# Altium PCB RadiationDetector.PcbDoc (part 2 of 3)
Units mm, origin at the board's own origin, x right, y up, seen from the top; angles counter-clockwise.
Board outline 64 x 110 mm, 2 copper layers (Top Layer, Bottom Layer); 114 components, 79 nets, 398 pads, 0 vias.
Unrouted connection lines stored in the file: 269.
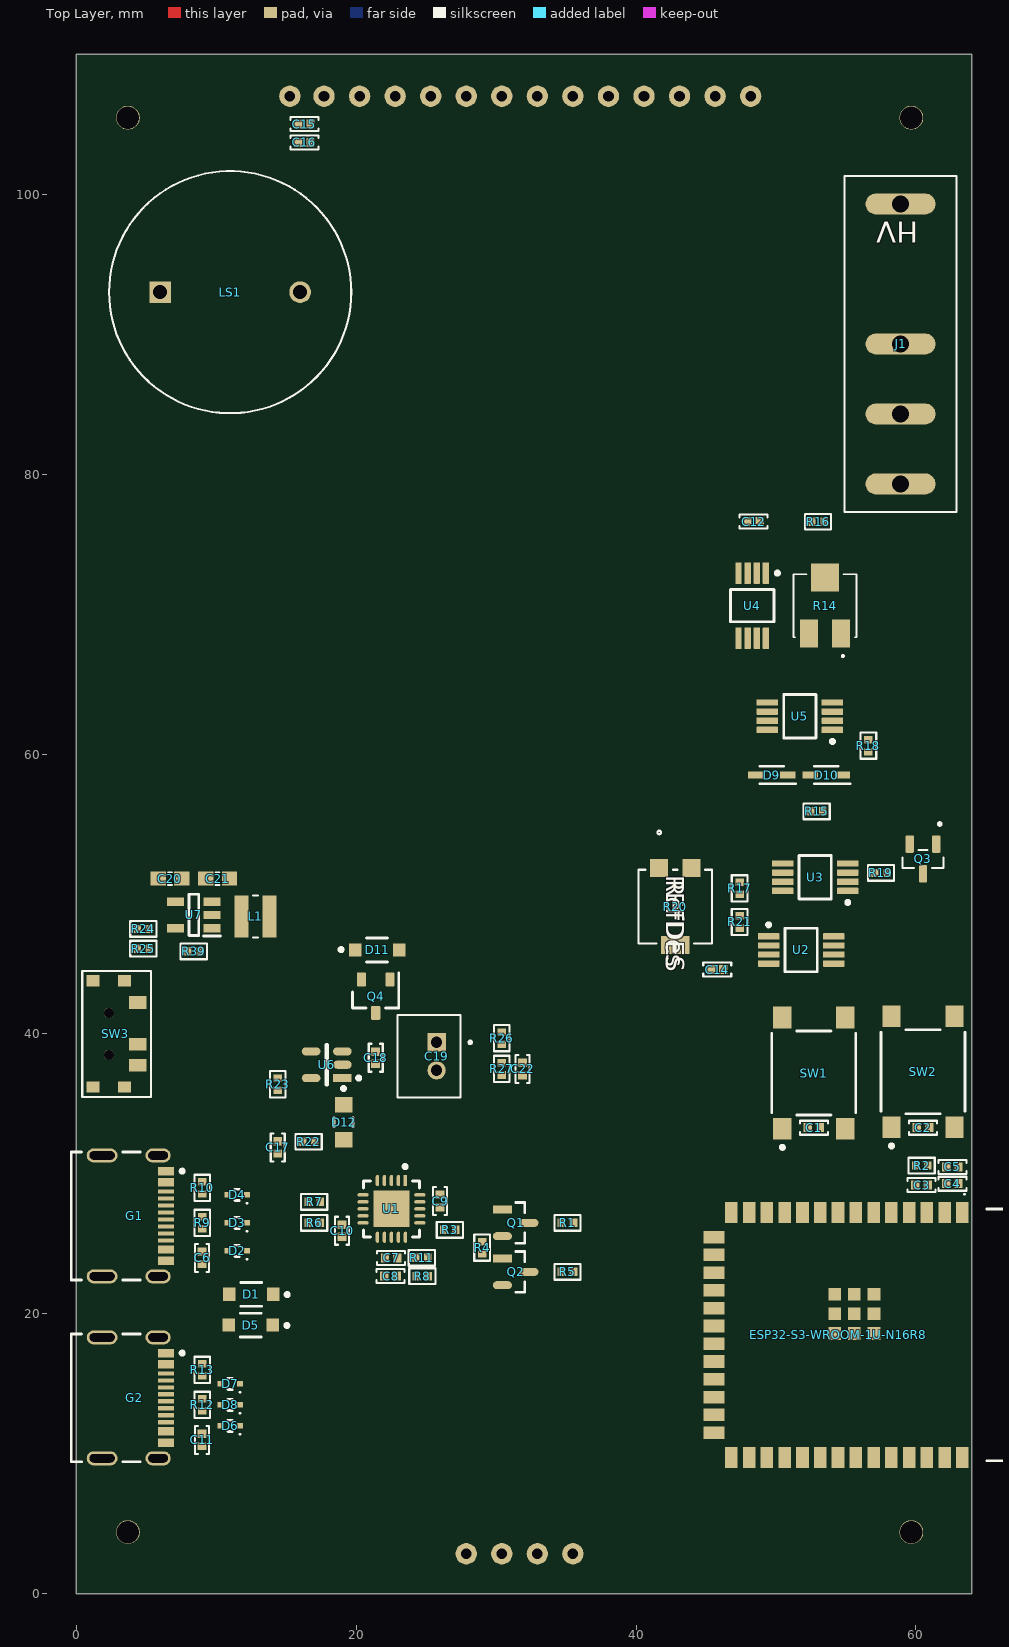
[diagram p0: Top Layer view]

## Part data (continued)
D2 D3 D4 D6 D7 D8: "TVS DIODE 5VWM SOD523", Breakdown Voltage-Nom=6.8V, LCSC Part Number=C93623, Manufacturer="ON Semiconductor", Max Breakdown Voltage=7.8V, Max Operating Temperature=150°C, Max Power Dissipation=200mW, Min Breakdown Voltage=5.8V, Min Operating Temperature=-55°C, Non-rep Peak Rev Power Dis-Max=50W, Package Body Material=Plastic, Package Shape=Rectangular, Package Style="SMALL OUTLINEMeter", Peak Reflow Temperature (Cel)=260°C, Rep Pk Reverse Voltage-Max=5V, Supplier Part Number=ESD5B5.0ST1GOSCT-ND, Time @ Peak Reflow Temperature-Max (s)=40s, Category="ESD and Circuit Protection ICs", ComponentLink1Description=https://datasheet.ciiva.com:443/pdfs/VipMasterIC/IC/ONSM/ONSM-S-A0006115580/ONSM-S-A0006115580-1.pdf?src-supplier=IHS+Markit, ComponentLink1URL=https://datasheet.ciiva.com:443/pdfs/VipMasterIC/IC/ONSM/ONSM-S-A0006115580/ONSM-S-A0006115580-1.pdf?src-supplier=IHS+Markit, ComponentLink2Description=https://datasheet.ciiva.com/339/esd5b5-0st1g-339772.pdf?src-supplier=Avnet, ComponentLink2URL=https://datasheet.ciiva.com/339/esd5b5-0st1g-339772.pdf?src-supplier=Avnet, ComponentLink3Description=https://datasheet.ciiva.com/339/esd5b5-0st1g-339772.pdf?src-supplier=Digikey, ComponentLink3URL=https://datasheet.ciiva.com/339/esd5b5-0st1g-339772.pdf?src-supplier=Digikey, ComponentLink4Description=https://datasheet.ciiva.com/4510/esd5b5-0st1g-241623-4510548.pdf?src-supplier=Mouser, ComponentLink4URL=https://datasheet.ciiva.com/4510/esd5b5-0st1g-241623-4510548.pdf?src-supplier=Mouser, ComponentLink5Description=https://datasheet.ciiva.com/22637/716649-22637178.pdf?src-supplier=Element14, ComponentLink5URL=https://datasheet.ciiva.com/22637/716649-22637178.pdf?src-supplier=Element14, ComponentLink6Description=https://datasheet.ciiva.com/339/esd5b5-0st1-d-339773.pdf?src-supplier=Digikey, ComponentLink6URL=https://datasheet.ciiva.com/339/esd5b5-0st1-d-339773.pdf?src-supplier=Digikey, ComponentLink7Description=https://datasheet.ciiva.com/339/esd5b5-0st1-d-339774.pdf?src-supplier=Digikey, ComponentLink7URL=https://datasheet.ciiva.com/339/esd5b5-0st1-d-339774.pdf?src-supplier=Digikey, Diode Element Material=SILICON, Diode Type="TRANS VOLTAGE SUPPRESSOR", JESD-30 Code=R-PDSO-F2, JESD-609 Code=e3, Manufacturer Part Number=ESD5B5.0ST1G, Moisture Sensitivity Level=1, Number of Elements=2, Pins=2, Polarity=Bidirectional, Pricing="1=0,18, 10=0,098, 100=0,052, 500=0,051, 1000=0,05 (USD)", Qualification Status="Not Qualified", Reach SVHC Compliant=Yes, RoHS=Yes, RoHS Compliant=Yes, Stock=174346, Supplier=Digikey, Surface Mount=Yes, Technology=AVALANCHE, Terminal Finish=Tin, Terminal Form=Flat, Terminal Position=DUAL
D9 D10: "DIODE SCHOTTKY 40V 1A SOD323", LCSC Part Number=C36975, Manufacturer=Nexperia, Max Operating Temperature=150°C, Max Output current=1A, Package Body Material=Plastic, Package Shape=Rectangular, Package Style="SMALL OUTLINEMeter", Peak Reflow Temperature (Cel)=260°C, Supplier Part Number=1727-5211-1-ND, Time @ Peak Reflow Temperature-Max (s)=40s, Category="Schottky Diodes", ComponentLink1Description=https://datasheet.ciiva.com:443/pdfs/VipMasterIC/IC/PHGL/PHGLS19535/PHGLS19689-1.pdf?src-supplier=IHS+Markit, ComponentLink1URL=https://datasheet.ciiva.com:443/pdfs/VipMasterIC/IC/PHGL/PHGLS19535/PHGLS19689-1.pdf?src-supplier=IHS+Markit, ComponentLink2Description=http://www.farnell.com/datasheets/689588.pdf?src-supplier=Farnell, ComponentLink2URL=http://www.farnell.com/datasheets/689588.pdf?src-supplier=Farnell, ComponentLink3Description=https://datasheet.octopart.com/PMEG4010BEA%2C115-Nexperia-datasheet-142110124.pdf?src-supplier=Future+Electronics, ComponentLink3URL=https://datasheet.octopart.com/PMEG4010BEA%2C115-Nexperia-datasheet-142110124.pdf?src-supplier=Future+Electronics, ComponentLink4Description=https://datasheet.octopart.com/PMEG4010BEA%2C115-Nexperia-datasheet-180924740.pdf?src-supplier=Newark, ComponentLink4URL=https://datasheet.octopart.com/PMEG4010BEA%2C115-Nexperia-datasheet-180924740.pdf?src-supplier=Newark, Diode Element Material=SILICON, Diode Type=RECTIFIER, JESD-30 Code=R-PDSO-G2, JESD-609 Code=e3, Manufacturer Part Number=PMEG4010BEA,115, Moisture Sensitivity Level=1, Number of Elements=1, Pins=2, Pricing="1=0,29, 10=0,171, 100=0,109, 500=0,09678, 1000=0,08581 (USD)", Qualification Status="Not Qualified", Reach SVHC Compliant=Yes, RoHS=Yes, RoHS Compliant=Yes, Stock=84260, Supplier=Digikey, Surface Mount=Yes, Technology=SCHOTTKY, Terminal Finish=Tin, Terminal Form="Gull Wing", Terminal Position=DUAL
D12: library part LTST-C171KGKT, "LED RED CLEAR SMD", Color=Green, Forward Current=30mA, LCSC Part Number=C284871, Manufacturer="Vishay Lite-On", Max Operating Temperature=85°C, Min Operating Temperature=-55°C, Supplier Part Number=160-1426-6-ND, Category=LEDs, Channels=1, ComponentLink1Description=https://datasheet.ciiva.com:443/pdfs/VipMasterIC/IC/LITE/LITES11816/LITES11816-1.pdf?src-supplier=IHS+Markit, ComponentLink1URL=https://datasheet.ciiva.com:443/pdfs/VipMasterIC/IC/LITE/LITES11816/LITES11816-1.pdf?src-supplier=IHS+Markit, ComponentLink2Description=https://datasheet.ciiva.com/11774/0900766b80dc0298-11774377.pdf?src-supplier=Rs, ComponentLink2URL=https://datasheet.ciiva.com/11774/0900766b80dc0298-11774377.pdf?src-supplier=Rs, ComponentLink3Description=https://datasheet.ciiva.com/2110/s-110-ltst-c171kgkt-2110073.pdf?src-supplier=Digikey, ComponentLink3URL=https://datasheet.ciiva.com/2110/s-110-ltst-c171kgkt-2110073.pdf?src-supplier=Digikey, ComponentLink4Description=https://datasheet.ciiva.com/2110/s-110-ltst-c171kgkt-2110072.pdf?src-supplier=Digikey, ComponentLink4URL=https://datasheet.ciiva.com/2110/s-110-ltst-c171kgkt-2110072.pdf?src-supplier=Digikey, ComponentLink5Description=https://datasheet.ciiva.com/2110/s-110-ltst-c171kgkt-2110074.pdf?src-supplier=Digikey, ComponentLink5URL=https://datasheet.ciiva.com/2110/s-110-ltst-c171kgkt-2110074.pdf?src-supplier=Digikey, JESD-609 Code=e3, Lens Style="WATER CLEAR", Luminous Intensity-Nom=35mcd, Manufacturer Part Number=LTST-C171KGKT, Mounting Technology="Surface Mount", Optoelectronic Device Type="SINGLE COLOR LED", Overall Height=0.8mm, Packaging="Tape and Reel", Pins=2, Pricing="1=0,15, 10=0,105, 100=0,0723, 500=0,05736, 1000=0,05238 (USD)", Reach SVHC Compliant=Yes, RoHS=Yes, RoHS Compliant=Yes, Shape=Rectangular, Size=1.4mm, Stock=28500, Supplier=Digikey, Terminal Finish=Tin, Terminal Pitch=2.5mm, Viewing Angle=130°
D13: "2A 1000V 1.3V SMB-FL Diodes - General Purpose ROHS", LCSC Part Number=C5271853
D14 D15 D16 D17 D18: "DIODE ZENER 120V 3W DO214AC", LCSC Part Number=C511105, Manufacturer=MCC, Max Operating Temperature=150°C, Max Power Dissipation=3W, Min Operating Temperature=-55°C, Package Body Material=Plastic, Package Shape=Rectangular, Package Style="SMALL OUTLINEMeter", Peak Reflow Temperature (Cel)=260°C, Reference Voltage-Nom=120V, Supplier Part Number=3SMAJ5951B-TPMSCT-ND, Test Current=3.1mA, Time @ Peak Reflow Temperature-Max (s)=10s, Voltage Tol-Max=5%, Category="Zener Diodes", ComponentLink1Description=https://datasheet.ciiva.com:443/pdfs/VipMasterIC/IC/MCCC/MCCC-S-A0009752199/MCCC-S-A0009752199-1.pdf?src-supplier=IHS+Markit, ComponentLink1URL=https://datasheet.ciiva.com:443/pdfs/VipMasterIC/IC/MCCC/MCCC-S-A0009752199/MCCC-S-A0009752199-1.pdf?src-supplier=IHS+Markit, ComponentLink2Description=https://datasheet.ciiva.com/6389/3smaj5913b3smaj5956bdo-214ac-6389957.pdf?src-supplier=Digikey, ComponentLink2URL=https://datasheet.ciiva.com/6389/3smaj5913b3smaj5956bdo-214ac-6389957.pdf?src-supplier=Digikey, Diode Element Material=SILICON, Diode Type=ZENER, Dynamic Impedance-Max=380R, JEDEC-95 Code=DO-214AC, JESD-30 Code=R-PDSO-C2, JESD-609 Code=e3, Manufacturer Part Number=3SMAJ5951B-TP, Moisture Sensitivity Level=1, Number of Elements=1, Pins=2, Polarity=Unidirectional, Pricing="1=0,42, 10=0,259, 100=0,1637, 500=0,12212, 1000=0,098, 2000=0,09734 (USD)", Reach SVHC Compliant=No, RoHS=Yes, RoHS Compliant=Yes, Stock=10918, Supplier=Digikey, Surface Mount=Yes, Technology=ZENER, Terminal Finish=Tin, Terminal Form="C BEND", Terminal Position=DUAL
D19 D20: "DIODE STANDARD 250V 200MA SOT233", Forward Voltage=1V, LCSC Part Number=C8661, Manufacturer=onsemi, Max Operating Temperature=175°C, Max Output current=200mA, Rep Pk Reverse Voltage-Max=200V, Supplier Part Number=9843728, ComponentLink1Description=https://datasheet.ciiva.com/1179/82312-1179824.pdf?src-supplier=Element14, ComponentLink1URL=https://datasheet.ciiva.com/1179/82312-1179824.pdf?src-supplier=Element14, ComponentLink2Description=https://datasheet.ciiva.com/1179/82312-1179825.pdf?src-supplier=Element14, ComponentLink2URL=https://datasheet.ciiva.com/1179/82312-1179825.pdf?src-supplier=Element14, Diode Type=RECTIFIER, JESD-609 Code=e0, Manufacturer Part Number=BAS21, Number of Elements=1, Pricing="5=0,185, 25=0,136, 100=0,0803, 250=0,0677, 500=0,0551, 1000=0,0425, 5000=0,023 (GBP)", Reverse Recovery Time-Max=0.05us, RoHS=Yes, RoHS Compliant=No, Supplier=Farnell, Surface Mount=Yes, Terminal Finish=Tin
ESP32-S3-WROOM-1U-N16R8: library part ESP32-S3-WROOM-1-N16R8, "SMD Module, ESP32-S3R8 With 8 mb", LCSC Part Number=C2913202, Manufacturer="Espressif Systems", Supplier Part Number=1965-ESP32-S3-WROOM-1U-N16R8CT-ND, Category=LDO, ComponentLink1Description=https://datasheet.octopart.com/ESP32-S3-WROOM-1U-N16R8-Espressif-Systems-datasheet-165560563.pdf?src-supplier=TME, ComponentLink1URL=https://datasheet.octopart.com/ESP32-S3-WROOM-1U-N16R8-Espressif-Systems-datasheet-165560563.pdf?src-supplier=TME, Manufacturer Part Number=ESP32-S3-WROOM-1U-N16R8, Pricing="1=6,56, 10=5,683, 25=5,378, 100=4,9592, 250=4,7084 (USD)", RoHS=No, Stock=124, Supplier=Digikey
G1 G2: library part 217179-0001, "CONN RCP USB2.0 TYP C 24P SMD RA", LCSC Part Number=C3197684, Manufacturer=Molex, Supplier Part Number=900-2171790001CT-ND, Category=Connectors, Manufacturer Part Number=217179-0001, Pricing="1=0,83, 10=0,704, 25=0,6596, 50=0,628, 100=0,598, 250=0,56052, 500=0,53374 (USD)", RoHS=No, Stock=19206, Supplier=Digikey
L1: library part VLS3015ET-2R2M, "1.35A 2.2uH ±20% 1.35A SMD,3x3mm Power Inductors ROHS", DC Resistance (DCR)=84mR, Inductance-Nom (L)=2.2uH, Inductor Application="POWER INDUCTOR", Inductor Type="GENERAL PURPOSE INDUCTOR", LCSC Part Number=C76864, Manufacturer=TDK, Max Current Rating=1.75A, Max Operating Temperature=105°C, Min Operating Temperature=-40°C, Package Height=1.5mm, Package Length=3mm, Package Style=SMTMeter, Supplier Part Number=445-6675-1-ND, Test Frequency=1MHz, Tolerance=20%, Category="Fixed Inductors", Channels=1, ComponentLink1Description=https://datasheet.ciiva.com:443/pdfs/VipMasterIC/IC/TDKC/TDKC-S-A0004908400/TDKC-S-A0004908400-1.pdf?src-supplier=IHS+Markit, ComponentLink1URL=https://datasheet.ciiva.com:443/pdfs/VipMasterIC/IC/TDKC/TDKC-S-A0004908400/TDKC-S-A0004908400-1.pdf?src-supplier=IHS+Markit, ComponentLink2Description=https://datasheet.ciiva.com/28425/1760475-28425754.pdf?src-supplier=Element14, ComponentLink2URL=https://datasheet.ciiva.com/28425/1760475-28425754.pdf?src-supplier=Element14, Construction="Magnetic Shielded", Manufacturer Part Number=VLS3015ET-2R2M, Package Width=3mm, Packaging="Tape and Reel", Pins=2, Pricing="1=0,26, 10=0,214, 100=0,1759, 1000=0,14461, 2000=0,13908, 4000=0,13114, 6000=0,12671, 10000=0,12135, 14000=0,11795, 20000=0,11444, 50000=0,10593 (USD)", Reach SVHC Compliant=Yes, RoHS=Yes, RoHS Compliant=Yes, Shape/Size Description="RECTANGULAR PACKAGE", Shielding=Shielded, Stock=23527, Supplier=Digikey, Surface Mount=Yes, Terminal Placement="Dual Ended", Termination="One Surface"
L2: library part 48102SC, "FIXED IND 1MH 520MA 1.85 OHM SMD", DC Resistance (DCR)=1.85R, Inductance-Nom (L)=1000uH, Inductor Application="POWER INDUCTOR", Inductor Type="GENERAL PURPOSE INDUCTOR", LCSC Part Number=C5223670, Manufacturer=Murata, Max Operating Temperature=85°C, Min Operating Temperature=-40°C, Self Resonant Frequency=4MHz, Supplier Part Number=811-3598-1-ND, Test Frequency=10kHz, Tolerance=20%, Category="Fixed Inductors", Channels=1, ComponentLink1Description=https://datasheet.ciiva.com:443/pdfs/VipMasterIC/IC/MUPS/MUPS-S-A0002835574/MUPS-S-A0002835574-1.pdf?src-supplier=IHS+Markit, ComponentLink1URL=https://datasheet.ciiva.com:443/pdfs/VipMasterIC/IC/MUPS/MUPS-S-A0002835574/MUPS-S-A0002835574-1.pdf?src-supplier=IHS+Markit, ComponentLink2Description=https://datasheet.ciiva.com/8510/kmp-4800s-8510640.pdf?src-supplier=Avnet, ComponentLink2URL=https://datasheet.ciiva.com/8510/kmp-4800s-8510640.pdf?src-supplier=Avnet, JESD-609 Code=e3, Manufacturer Part Number=48102SC, Pins=2, Pricing="1=0,52 (USD)", Reach SVHC Compliant=Yes, RoHS=Yes, RoHS Compliant=Yes, Shape/Size Description="RECTANGULAR PACKAGE", Shielding=Shielded, Stock=1140, Supplier=Digikey, Surface Mount=Yes, Terminal Finish=Tin, Terminal Placement="Dual Ended", Termination="One Surface"
LS1: "Data Line Filter, 1 Function(s)", LCSC Part Number=C96061
Q1 Q2: "Transistores - Bipolar (BJT) - Simple NPN 25 V 1.5 A 100MHz 300 mW Montaje en superficie SOT-23-3", LCSC Part Number=C164886, Manufacturer=Comchip, Supplier Part Number=641-1790-1-ND, Category=Transistors, ComponentLink1Description=https://datasheet.ciiva.com:443/pdfs/VipMasterIC/IC/COMC/COMC-S-A0004994192/COMC-S-A0004994192-1.pdf?src-supplier=IHS+Markit, ComponentLink1URL=https://datasheet.ciiva.com:443/pdfs/VipMasterIC/IC/COMC/COMC-S-A0004994192/COMC-S-A0004994192-1.pdf?src-supplier=IHS+Markit, ComponentLink2Description="http://www.comchiptech.com/admin/files/product/SS8050-G RevA181526.pdf?src-supplier=Digikey", ComponentLink2URL="http://www.comchiptech.com/admin/files/product/SS8050-G RevA181526.pdf?src-supplier=Digikey", Manufacturer Part Number=SS8050-G, Pricing="1=0,24, 10=0,148, 100=0,0921, 500=0,06754, 1000=0,05958 (USD)", Reach SVHC Compliant=Yes, RoHS=Yes, RoHS Compliant=Yes, Stock=131317, Supplier=Digikey
Q3: "MOSFET SOT23 N 60V 5OHM 150C", Drain Current-Max (Abs) (ID)=115mA, Drain-source On Resistance-Max=7.5R, DS Breakdown Voltage-Min=60V, LCSC Part Number=C124475, Manufacturer="ON Semiconductor / Fairchild", Max Operating Temperature=150°C, Operating Mode="ENHANCEMENT MODE", Package Body Material=Plastic, Package Shape=Rectangular, Package Style="SMALL OUTLINEMeter", Power Dissipation-Max (Abs)=200mW, Supplier Part Number=2N7002NCT-ND, Category=MOSFETs, ComponentLink1Description=https://datasheet.ciiva.com:443/pdfs/VipMasterIC/IC/ONSM/ONSM-S-A0003544006/ONSM-S-A0003544006-1.pdf?src-supplier=IHS+Markit, ComponentLink1URL=https://datasheet.ciiva.com:443/pdfs/VipMasterIC/IC/ONSM/ONSM-S-A0003544006/ONSM-S-A0003544006-1.pdf?src-supplier=IHS+Markit, ComponentLink2Description=https://datasheet.ciiva.com/931/2n7000-931777.pdf?src-supplier=Farnell, ComponentLink2URL=https://datasheet.ciiva.com/931/2n7000-931777.pdf?src-supplier=Farnell, ComponentLink3Description=https://datasheet.ciiva.com/1254/2n7002-1254451.pdf?src-supplier=Newark, ComponentLink3URL=https://datasheet.ciiva.com/1254/2n7002-1254451.pdf?src-supplier=Newark, ComponentLink4Description=https://datasheet.ciiva.com/15137/getdatasheetpartid-93547-15137771.pdf?src-supplier=Verical, ComponentLink4URL=https://datasheet.ciiva.com/15137/getdatasheetpartid-93547-15137771.pdf?src-supplier=Verical, ComponentLink5Description=https://datasheet.ciiva.com/931/2n7000-931763.pdf?src-supplier=Digikey, ComponentLink5URL=https://datasheet.ciiva.com/931/2n7000-931763.pdf?src-supplier=Digikey, ComponentLink6Description=https://datasheet.ciiva.com/3304/nds7002a-3304381.pdf?src-supplier=Avnet, ComponentLink6URL=https://datasheet.ciiva.com/3304/nds7002a-3304381.pdf?src-supplier=Avnet, ComponentLink7Description=https://datasheet.ciiva.com/1188/660093-1188361.pdf?src-supplier=Element14, ComponentLink7URL=https://datasheet.ciiva.com/1188/660093-1188361.pdf?src-supplier=Element14, ComponentLink8Description=https://datasheet.ciiva.com/931/2n7000-931762.pdf?src-supplier=Digikey, ComponentLink8URL=https://datasheet.ciiva.com/931/2n7000-931762.pdf?src-supplier=Digikey, ComponentLink9Description=https://datasheet.ciiva.com/1254/660093-1254452.pdf?src-supplier=Newark, ComponentLink9URL=https://datasheet.ciiva.com/1254/660093-1254452.pdf?src-supplier=Newark, ComponentLink10Description=https://datasheet.ciiva.com/17007/2n7002-17007243.pdf?src-supplier=Future+Electronics, ComponentLink10URL=https://datasheet.ciiva.com/17007/2n7002-17007243.pdf?src-supplier=Future+Electronics, ComponentLink11Description=https://datasheet.ciiva.com/22655/660093-22655230.pdf?src-supplier=Element14, ComponentLink11URL=https://datasheet.ciiva.com/22655/660093-22655230.pdf?src-supplier=Element14, Drain Current-Max (ID)=115mA, Feedback Cap-Max (Crss)=5pF, FET Technology="METAL-OXIDE SEMICONDUCTOR", JEDEC-95 Code=TO-236AB, JESD-30 Code=R-PDSO-G3, JESD-609 Code=e3, Manufacturer Part Number=2N7002, Moisture Sensitivity Level=1, Number of Elements=1, Pins=3, Polarity/Channel Type=N-CHANNEL, Pricing="1=0,49, 10=0,285, 100=0,1683, 500=0,16466, 1000=0,15124 (USD)", Qualification Status="Not Qualified", Reach SVHC Compliant=Yes, RoHS=Yes, RoHS Compliant=Yes, Stock=13333, Supplier=Digikey, Surface Mount=Yes, Terminal Finish=Tin, Terminal Form="Gull Wing", Terminal Position=DUAL, Transistor Application=SWITCHING, Transistor Element Material=SILICON
Q4: "20V 2.4A 110mΩ@4.5V,2.7A 1.1W 1V@250uA 1 P-Channel SOT-23-3 MOSFETs ROHS", LCSC Part Number=C6562215
Q5: "20V 2.5A 46mΩ@4.5V,2.5A 650mV 1 N-channel SOT-23 MOSFETs ROHS", LCSC Part Number=C296302
Q6: "MOSFET N-CH 800V 2.5A DPAK", Avalanche Energy Rating (Eas)=170mJ, Drain Current-Max (Abs) (ID)=2.5A, Drain-source On Resistance-Max=4.5R, DS Breakdown Voltage-Min=800V, LCSC Part Number=C411398, Manufacturer=STMicroelectronics, Max Operating Temperature=150°C, Operating Mode="ENHANCEMENT MODE", Package Body Material=Plastic, Package Shape=Rectangular, Package Style="SMALL OUTLINEMeter", Peak Reflow Temperature (Cel)=260°C, Power Dissipation-Max (Abs)=70W, Pulsed Drain Current-Max (IDM)=10A, Supplier Part Number=497-7968-1-ND, Category=MOSFETs, ComponentLink1Description=https://datasheet.ciiva.com:443/pdfs/VipMasterIC/IC/SGST/SGST-S-A0003061510/SGST-S-A0003061510-1.pdf?src-supplier=IHS+Markit, ComponentLink1URL=https://datasheet.ciiva.com:443/pdfs/VipMasterIC/IC/SGST/SGST-S-A0003061510/SGST-S-A0003061510-1.pdf?src-supplier=IHS+Markit, ComponentLink2Description=https://datasheet.ciiva.com/6380/cd00003377-6380362.pdf?src-supplier=Digikey, ComponentLink2URL=https://datasheet.ciiva.com/6380/cd00003377-6380362.pdf?src-supplier=Digikey, ComponentLink3Description=https://datasheet.ciiva.com/6380/cd00003377-6380363.pdf?src-supplier=Digikey, ComponentLink3URL=https://datasheet.ciiva.com/6380/cd00003377-6380363.pdf?src-supplier=Digikey, ComponentLink4Description=https://datasheet.ciiva.com/6380/cd00003377-6380364.pdf?src-supplier=Digikey, ComponentLink4URL=https://datasheet.ciiva.com/6380/cd00003377-6380364.pdf?src-supplier=Digikey, ComponentLink5Description=https://datasheet.ciiva.com/16220/cd00003377-16220246.pdf?src-supplier=Future+Electronics, ComponentLink5URL=https://datasheet.ciiva.com/16220/cd00003377-16220246.pdf?src-supplier=Future+Electronics, ComponentLink6Description=https://datasheet.ciiva.com/8025/1689953-8025081.pdf?src-supplier=Element14, ComponentLink6URL=https://datasheet.ciiva.com/8025/1689953-8025081.pdf?src-supplier=Element14, Drain Current-Max (ID)=2.5A, FET Technology="METAL-OXIDE SEMICONDUCTOR", JEDEC-95 Code=TO-252, JESD-30 Code=R-PSSO-G2, JESD-609 Code=e3, Manufacturer Part Number=STD3NK80ZT4, Moisture Sensitivity Level=1, Number of Elements=1, Pins=2, Polarity/Channel Type=N-CHANNEL, Pricing="1=2,08, 10=1,336, 100=1,0404, 500=0,83494, 1000=0,81702 (USD)", Qualification Status="Not Qualified", Reach SVHC Compliant=No, RoHS=Yes, RoHS Compliant=Yes, Stock=5628, Supplier=Digikey, Surface Mount=Yes, Terminal Finish=Tin, Terminal Form="Gull Wing", Terminal Position=SINGLE, Transistor Application=SWITCHING, Transistor Element Material=SILICON
R1 R5: library part RC0402JR-070RL, "RES 0 OHM JUMPER 1/16W 0402", Case/Package=0402, LCSC Part Number=C60485, Manufacturer=Yageo, Max Operating Temperature=155°C, Min Operating Temperature=-55°C, Package Height=0.35mm, Package Length=1mm, Package Shape=Rectangular, Package Width=0.5mm, Power=62.5mW, Rated Temperature=70°C, Resistor Type="FIXED RESISTOR", Supplier Part Number=311-0.0JRCT-ND, Category="Chip SMD Resistors", ComponentLink1Description=https://datasheet.ciiva.com:443/pdfs/VipMasterIC/IC/YAGO/YAGO-S-A0008145938/YAGO-S-A0008145938-1.pdf?src-supplier=IHS+Markit, ComponentLink1URL=https://datasheet.ciiva.com:443/pdfs/VipMasterIC/IC/YAGO/YAGO-S-A0008145938/YAGO-S-A0008145938-1.pdf?src-supplier=IHS+Markit, Construction=Chip, JESD-609 Code=e3, Manufacturer Part Number=RC0402JR-070RL, Mounting Technology="Surface Mount", Packaging="Tape and Reel", Pins=2, Pricing="1=0,1, 10=0,01, 25=0,0064, 50=0,0054, 100=0,0047, 250=0,00392, 500=0,00346, 1000=0,00304, 5000=0,0023 (USD)", Reach SVHC Compliant=Yes, RoHS=Yes, RoHS Compliant=Yes, Stock=1886568, Supplier=Digikey, Technology="METAL GLAZE/THICK FILM", Terminal Finish=Nickel, Termination=Wraparound
R2 R3 R4 R11 R32: library part AC0402FR-0710KL, "RES SMD 10K OHM 1% 1/16W 0402", Case/Package=0402, LCSC Part Number=C144807, Manufacturer=Yageo, Max Operating Temperature=155°C, Min Operating Temperature=-55°C, Package Height=0.32mm, Package Length=1mm, Package Shape=Rectangular, Package Width=0.5mm, Power=62.5mW, Rated Temperature=70°C, Resistor Type="FIXED RESISTOR", Supplier Part Number=YAG3436CT-ND, Temperature Coefficient (ppm/Cel)=100, Tolerance=1%, Working Voltage=50V, Additional Feature="LASER TRIMMABLE", Category="Chip SMD Resistors", ComponentLink1Description=https://datasheet.ciiva.com:443/pdfs/VipMasterIC/IC/YAGO/YAGO-S-A0003597364/YAGO-S-A0003597364-1.pdf?src-supplier=IHS+Markit, ComponentLink1URL=https://datasheet.ciiva.com:443/pdfs/VipMasterIC/IC/YAGO/YAGO-S-A0003597364/YAGO-S-A0003597364-1.pdf?src-supplier=IHS+Markit, ComponentLink2Description=https://datasheet.ciiva.com/12656/pyu-ac-51-rohs-l-2-12656634.pdf?src-supplier=Mouser, ComponentLink2URL=https://datasheet.ciiva.com/12656/pyu-ac-51-rohs-l-2-12656634.pdf?src-supplier=Mouser, Construction=Chip, JESD-609 Code=e3, Manufacturer Part Number=AC0402FR-0710KL, Mounting Technology="Surface Mount", Packaging="Tape and Reel", Pins=2, Pricing="1=0,1, 10=0,009, 100=0,0082, 1000=0,00612, 2500=0,0051, 5000=0,00407 (USD)", Reach SVHC Compliant=Yes, Reference Standard=AEC-Q200, RoHS=Yes, RoHS Compliant=Yes, Stock=269638, Supplier=Digikey, Technology="METAL GLAZE/THICK FILM", Terminal Finish=Nickel, Termination=Wraparound
R6 R7: library part AC0402FR-0727RL, "RES SMD 27 OHM 1% 1/16W 0402", Case/Package=0402, LCSC Part Number=C226392, Manufacturer=Yageo, Max Operating Temperature=155°C, Min Operating Temperature=-55°C, Package Height=0.32mm, Package Length=1mm, Package Shape=Rectangular, Package Width=0.5mm, Power=62.5mW, Rated Temperature=70°C, Resistor Type="FIXED RESISTOR", Supplier Part Number=YAG5278CT-ND, Temperature Coefficient (ppm/Cel)=100, Tolerance=1%, Working Voltage=50V, Additional Feature="LASER TRIMMABLE", Category="Chip SMD Resistors", ComponentLink1Description=https://datasheet.ciiva.com:443/pdfs/VipMasterIC/IC/YAGO/YAGO-S-A0003597364/YAGO-S-A0003597364-1.pdf?src-supplier=IHS+Markit, ComponentLink1URL=https://datasheet.ciiva.com:443/pdfs/VipMasterIC/IC/YAGO/YAGO-S-A0003597364/YAGO-S-A0003597364-1.pdf?src-supplier=IHS+Markit, ComponentLink2Description=http://www.yageo.com/NewPortal/yageodocoutput?fileName=/pdf/R-Chip/PYu-AC_51_RoHS_L_5.pdf&src-supplier=Digikey, ComponentLink2URL=http://www.yageo.com/NewPortal/yageodocoutput?fileName=/pdf/R-Chip/PYu-AC_51_RoHS_L_5.pdf&src-supplier=Digikey, ComponentLink3Description=http://www.yageo.com/NewPortal/yageodocoutput?fileName=/pdf/R-Chip/PYu-AC_51_RoHS_L_6.pdf&src-supplier=Digikey, ComponentLink3URL=http://www.yageo.com/NewPortal/yageodocoutput?fileName=/pdf/R-Chip/PYu-AC_51_RoHS_L_6.pdf&src-supplier=Digikey, ComponentLink4Description=https://datasheet.octopart.com/AC0402FR-0727RL-Yageo-datasheet-151884373.pdf?src-supplier=Future+Electronics, ComponentLink4URL=https://datasheet.octopart.com/AC0402FR-0727RL-Yageo-datasheet-151884373.pdf?src-supplier=Future+Electronics, Construction=Chip, JESD-609 Code=e3, Manufacturer Part Number=AC0402FR-0727RL, Mounting Technology="Surface Mount", Packaging="Tape and Reel", Pins=2, Pricing="1=0,1, 10=0,01, 100=0,0071, 1000=0,00612, 2500=0,0051, 5000=0,00407 (USD)", Reach SVHC Compliant=Yes, Reference Standard=AEC-Q200, RoHS=Yes, RoHS Compliant=Yes, Stock=4685, Supplier=Digikey, Technology="METAL GLAZE/THICK FILM", Terminal Finish=Nickel, Termination=Wraparound
R8: library part AC0402FR-074K7L, "RES SMD 4.7K OHM 1% 1/16W 0402", Case/Package=0402, LCSC Part Number=C174364, Manufacturer=Yageo, Max Operating Temperature=155°C, Min Operating Temperature=-55°C, Package Height=0.32mm, Package Length=1mm, Package Shape=Rectangular, Package Width=0.5mm, Power=62.5mW, Rated Temperature=70°C, Resistor Type="FIXED RESISTOR", Supplier Part Number=YAG3497CT-ND, Temperature Coefficient (ppm/Cel)=100, Tolerance=1%, Working Voltage=50V, Additional Feature="LASER TRIMMABLE", Category="Chip SMD Resistors", ComponentLink1Description=https://datasheet.ciiva.com:443/pdfs/VipMasterIC/IC/YAGO/YAGO-S-A0003597364/YAGO-S-A0003597364-1.pdf?src-supplier=IHS+Markit, ComponentLink1URL=https://datasheet.ciiva.com:443/pdfs/VipMasterIC/IC/YAGO/YAGO-S-A0003597364/YAGO-S-A0003597364-1.pdf?src-supplier=IHS+Markit, ComponentLink2Description=http://www.mouser.com/ds/2/447/yageodocoutput-1111992.pdf?src-supplier=Mouser, ComponentLink2URL=http://www.mouser.com/ds/2/447/yageodocoutput-1111992.pdf?src-supplier=Mouser, ComponentLink3Description=http://www.yageo.com/NewPortal/yageodocoutput?fileName=/pdf/R-Chip/PYu-AC_51_RoHS_L_6.pdf&src-supplier=Digikey, ComponentLink3URL=http://www.yageo.com/NewPortal/yageodocoutput?fileName=/pdf/R-Chip/PYu-AC_51_RoHS_L_6.pdf&src-supplier=Digikey, ComponentLink4Description=http://www.yageo.com/documents/recent/PYu-AC_51_RoHS_L_2_revised.pdf?src-supplier=Future+Electronics, ComponentLink4URL=http://www.yageo.com/documents/recent/PYu-AC_51_RoHS_L_2_revised.pdf?src-supplier=Future+Electronics, Construction=Chip, JESD-609 Code=e3, Manufacturer Part Number=AC0402FR-074K7L, Mounting Technology="Surface Mount", Packaging="Tape and Reel", Pins=2, Pricing="1=0,1, 10=0,011, 100=0,0082, 1000=0,00612, 2500=0,0051, 5000=0,00407 (USD)", Reach SVHC Compliant=Yes, Reference Standard=AEC-Q200, RoHS=Yes, RoHS Compliant=Yes, Stock=127046, Supplier=Digikey, Technology="METAL GLAZE/THICK FILM", Terminal Finish=Nickel, Termination=Wraparound
R9 R10 R12 R13: library part AC0402FR-075K1L, "RES SMD 5.1K OHM 1% 1/16W 0402", Case/Package=0402, LCSC Part Number=C144745, Manufacturer=Yageo, Max Operating Temperature=155°C, Min Operating Temperature=-55°C, Package Height=0.32mm, Package Length=1mm, Package Shape=Rectangular, Package Width=0.5mm, Power=62.5mW, Rated Temperature=70°C, Resistor Type="FIXED RESISTOR", Supplier Part Number=YAG3503CT-ND, Temperature Coefficient (ppm/Cel)=100, Tolerance=1%, Working Voltage=50V, Additional Feature="LASER TRIMMABLE", Category="Chip SMD Resistors", ComponentLink1Description=https://datasheet.ciiva.com:443/pdfs/VipMasterIC/IC/YAGO/YAGO-S-A0003597364/YAGO-S-A0003597364-1.pdf?src-supplier=IHS+Markit, ComponentLink1URL=https://datasheet.ciiva.com:443/pdfs/VipMasterIC/IC/YAGO/YAGO-S-A0003597364/YAGO-S-A0003597364-1.pdf?src-supplier=IHS+Markit, ComponentLink2Description=https://datasheet.octopart.com/AC0402FR-075K1L-Yageo-datasheet-166720450.pdf?src-supplier=Future+Electronics, ComponentLink2URL=https://datasheet.octopart.com/AC0402FR-075K1L-Yageo-datasheet-166720450.pdf?src-supplier=Future+Electronics, ComponentLink3Description=http://www.yageo.com/documents/recent/PYu-AC_51_RoHS_L_2_revised.pdf?src-supplier=Future+Electronics, ComponentLink3URL=http://www.yageo.com/documents/recent/PYu-AC_51_RoHS_L_2_revised.pdf?src-supplier=Future+Electronics, ComponentLink4Description=http://www.yageo.com/NewPortal/yageodocoutput?fileName=/pdf/R-Chip/PYu-AC_51_RoHS_L_6.pdf&src-supplier=Digikey, ComponentLink4URL=http://www.yageo.com/NewPortal/yageodocoutput?fileName=/pdf/R-Chip/PYu-AC_51_RoHS_L_6.pdf&src-supplier=Digikey, Construction=Chip, JESD-609 Code=e3, Manufacturer Part Number=AC0402FR-075K1L, Mounting Technology="Surface Mount", Packaging="Tape and Reel", Pins=2, Pricing="1=0,1, 10=0,009, 100=0,0071, 1000=0,00612, 2500=0,0051, 5000=0,00407, 10000=0,00204 (USD)", Reach SVHC Compliant=Yes, Reference Standard=AEC-Q200, RoHS=Yes, RoHS Compliant=Yes, Stock=58891, Supplier=Digikey, Technology="METAL GLAZE/THICK FILM", Terminal Finish=Nickel, Termination=Wraparound
R14: library part 3314J-1-202E, "TRIMMER 2K OHM 0.25W J LEAD TOP", Case/Package=2018, LCSC Part Number=C94513, Manufacturer=Bourns, Max Operating Temperature=125°C, Min Operating Temperature=-55°C, Package Height=2.55mm, Package Length=5mm, Package Shape=Rectangular, Package Width=4.5mm, Power=250mW, Rated Temperature=70°C, Resistance Law=Linear, Resistor Type=TRIMMER, Supplier Part Number=3314J-202ECT-ND, Temperature Coefficient (ppm/Cel)=-100,100, Tolerance=20%, Actuator Orientation=Vertical, Actuator Type=SCREW, Category="Variable Resistors and Potentiometers", ComponentLink1Description=https://datasheet.ciiva.com:443/pdfs/VipMasterIC/IC/BOUR/BOUR-S-A0008818047/BOUR-S-A0008818047-1.pdf?src-supplier=IHS+Markit, ComponentLink1URL=https://datasheet.ciiva.com:443/pdfs/VipMasterIC/IC/BOUR/BOUR-S-A0008818047/BOUR-S-A0008818047-1.pdf?src-supplier=IHS+Markit, ComponentLink2Description=https://datasheet.ciiva.com/6197/1770665-6197457.pdf?src-supplier=Farnell, ComponentLink2URL=https://datasheet.ciiva.com/6197/1770665-6197457.pdf?src-supplier=Farnell, ComponentLink3Description=https://datasheet.ciiva.com/11831/0900766b800302ec-11831929.pdf?src-supplier=Rs, ComponentLink3URL=https://datasheet.ciiva.com/11831/0900766b800302ec-11831929.pdf?src-supplier=Rs, ComponentLink4Description=https://datasheet.ciiva.com/2156/3314-2156300.pdf?src-supplier=Digikey, ComponentLink4URL=https://datasheet.ciiva.com/2156/3314-2156300.pdf?src-supplier=Digikey, ComponentLink5Description=https://datasheet.ciiva.com/2156/3314-2156301.pdf?src-supplier=Digikey, ComponentLink5URL=https://datasheet.ciiva.com/2156/3314-2156301.pdf?src-supplier=Digikey, ComponentLink6Description=https://datasheet.ciiva.com/2156/3314-2156302.pdf?src-supplier=Digikey, ComponentLink6URL=https://datasheet.ciiva.com/2156/3314-2156302.pdf?src-supplier=Digikey, ComponentLink7Description=https://datasheet.ciiva.com/3266/3314-3266277.pdf?src-supplier=Avnet, ComponentLink7URL=https://datasheet.ciiva.com/3266/3314-3266277.pdf?src-supplier=Avnet, ComponentLink8Description=https://datasheet.ciiva.com/30098/6393314-30098281.pdf?src-supplier=Onlinecomponents.com, ComponentLink8URL=https://datasheet.ciiva.com/30098/6393314-30098281.pdf?src-supplier=Onlinecomponents.com, ComponentLink9Description=https://datasheet.ciiva.com/1477/1846253-1477628.pdf?src-supplier=Element14, ComponentLink9URL=https://datasheet.ciiva.com/1477/1846253-1477628.pdf?src-supplier=Element14, ComponentLink10Description=https://datasheet.ciiva.com/22696/1846253-22696687.pdf?src-supplier=Element14, ComponentLink10URL=https://datasheet.ciiva.com/22696/1846253-22696687.pdf?src-supplier=Element14, ComponentLink11Description=https://datasheet.ciiva.com/48698/001055052-da-01-en-smd-trimm-3314j-1-202e-2k-ohm-0-25w-48698971.pdf?src-supplier=Conrad, ComponentLink11URL=https://datasheet.ciiva.com/48698/001055052-da-01-en-smd-trimm-3314j-1-202e-2k-ohm-0-25w-48698971.pdf?src-supplier=Conrad, Construction=Rectangular, JESD-609 Code=e3, Manufacturer Part Number=3314J-1-202E, Mounting Technology="Surface Mount", Number of Turns=1, Packaging="Tape and Reel", Pins=3, Pricing="1=1,58, 10=1,335, 100=1,1219 (USD)", Reach SVHC Compliant=Yes, RoHS=Yes, RoHS Compliant=Yes, Rotational Angle=240°, Stock=7573, Supplier=Digikey, Technology=CERMET, Terminal Finish=Tin, Termination="J BEND"
R15 R19 R21: library part AC0402JR-071KL, "RES SMD 1K OHM 5% 1/16W 0402", Case/Package=0402, LCSC Part Number=C138287, Manufacturer=Yageo, Max Operating Temperature=155°C, Min Operating Temperature=-55°C, Package Height=0.32mm, Package Length=1mm, Package Shape=Rectangular, Package Width=0.5mm, Power=62.5mW, Rated Temperature=70°C, Resistor Type="FIXED RESISTOR", Supplier Part Number=YAG3525CT-ND, Temperature Coefficient (ppm/Cel)=100, Tolerance=5%, Working Voltage=50V, Additional Feature="LASER TRIMMABLE", Category="Chip SMD Resistors", ComponentLink1Description=https://datasheet.ciiva.com:443/pdfs/VipMasterIC/IC/YAGO/YAGO-S-A0003597364/YAGO-S-A0003597364-1.pdf?src-supplier=IHS+Markit, ComponentLink1URL=https://datasheet.ciiva.com:443/pdfs/VipMasterIC/IC/YAGO/YAGO-S-A0003597364/YAGO-S-A0003597364-1.pdf?src-supplier=IHS+Markit, ComponentLink2Description=https://datasheet.ciiva.com/12577/pyu-ac-51-rohs-l-2-12577195.pdf?src-supplier=Mouser, ComponentLink2URL=https://datasheet.ciiva.com/12577/pyu-ac-51-rohs-l-2-12577195.pdf?src-supplier=Mouser, Construction=Chip, JESD-609 Code=e3, Manufacturer Part Number=AC0402JR-071KL, Mounting Technology="Surface Mount", Packaging="Tape and Reel", Pins=2, Pricing="1=0,1, 10=0,007, 50=0,0066, 100=0,0061, 500=0,0051, 1000=0,00408 (USD)", Reach SVHC Compliant=Yes, Reference Standard=AEC-Q200, RoHS=Yes, RoHS Compliant=Yes, Stock=135341, Supplier=Digikey, Technology="METAL GLAZE/THICK FILM", Terminal Finish=Nickel, Termination=Wraparound
R16 R22: library part AC0402FR-07150RL, "RES SMD 150 OHM 1% 1/16W 0402", Case/Package=0402, LCSC Part Number=C226790, Manufacturer=Yageo, Max Operating Temperature=155°C, Min Operating Temperature=-55°C, Package Height=0.32mm, Package Length=1mm, Package Shape=Rectangular, Package Width=0.5mm, Power=62.5mW, Rated Temperature=70°C, Resistor Type="FIXED RESISTOR", Supplier Part Number=YAG3443DKR-ND, Temperature Coefficient (ppm/Cel)=100, Tolerance=1%, Working Voltage=50V, Additional Feature="LASER TRIMMABLE", Category="Chip SMD Resistors", ComponentLink1Description=https://datasheet.ciiva.com:443/pdfs/VipMasterIC/IC/YAGO/YAGO-S-A0003597364/YAGO-S-A0003597364-1.pdf?src-supplier=IHS+Markit, ComponentLink1URL=https://datasheet.ciiva.com:443/pdfs/VipMasterIC/IC/YAGO/YAGO-S-A0003597364/YAGO-S-A0003597364-1.pdf?src-supplier=IHS+Markit, ComponentLink2Description=https://datasheet.ciiva.com/12576/pyu-ac-51-rohs-l-2-12576540.pdf?src-supplier=Mouser, ComponentLink2URL=https://datasheet.ciiva.com/12576/pyu-ac-51-rohs-l-2-12576540.pdf?src-supplier=Mouser, ComponentLink3Description=https://datasheet.octopart.com/AC0402FR-07150RL-Yageo-datasheet-83209224.pdf?src-supplier=Upverter, ComponentLink3URL=https://datasheet.octopart.com/AC0402FR-07150RL-Yageo-datasheet-83209224.pdf?src-supplier=Upverter, ComponentLink4Description=https://datasheet.octopart.com/AC0402FR-07150RL-Yageo-datasheet-178509465.pdf?src-supplier=Farnell, ComponentLink4URL=https://datasheet.octopart.com/AC0402FR-07150RL-Yageo-datasheet-178509465.pdf?src-supplier=Farnell, ComponentLink5Description=https://datasheet.octopart.com/AC0402FR-07150RL-Yageo-datasheet-12512238.pdf, ComponentLink5URL=https://datasheet.octopart.com/AC0402FR-07150RL-Yageo-datasheet-12512238.pdf, ComponentLink6Description=https://datasheet.octopart.com/AC0402FR-07150RL-Yageo-datasheet-166720450.pdf?src-supplier=Future+Electronics, ComponentLink6URL=https://datasheet.octopart.com/AC0402FR-07150RL-Yageo-datasheet-166720450.pdf?src-supplier=Future+Electronics, ComponentLink7Description=https://datasheet.octopart.com/AC0402FR-07150RL-Yageo-datasheet-151884373.pdf?src-supplier=Future+Electronics, ComponentLink7URL=https://datasheet.octopart.com/AC0402FR-07150RL-Yageo-datasheet-151884373.pdf?src-supplier=Future+Electronics, ComponentLink8Description=https://datasheet.octopart.com/AC0402FR-07150RL-Yageo-datasheet-137699919.pdf?src-supplier=Future+Electronics, ComponentLink8URL=https://datasheet.octopart.com/AC0402FR-07150RL-Yageo-datasheet-137699919.pdf?src-supplier=Future+Electronics, ComponentLink9Description=https://datasheet.octopart.com/AC0402FR-07150RL-Yageo-datasheet-24580492.pdf?src-supplier=Future+Electronics, ComponentLink9URL=https://datasheet.octopart.com/AC0402FR-07150RL-Yageo-datasheet-24580492.pdf?src-supplier=Future+Electronics, ComponentLink10Description=https://datasheet.octopart.com/AC0402FR-07150RL-Yageo-datasheet-13029202.pdf?src-supplier=Future+Electronics, ComponentLink10URL=https://datasheet.octopart.com/AC0402FR-07150RL-Yageo-datasheet-13029202.pdf?src-supplier=Future+Electronics, ComponentLink11Description=https://datasheet.octopart.com/AC0402FR-07150RL-Yageo-datasheet-140571090.pdf?src-supplier=Arrow.cn, ComponentLink11URL=https://datasheet.octopart.com/AC0402FR-07150RL-Yageo-datasheet-140571090.pdf?src-supplier=Arrow.cn, Construction=Chip, JESD-609 Code=e3, Manufacturer Part Number=AC0402FR-07150RL, Mounting Technology="Surface Mount", Packaging="Tape and Reel", Pins=2, Pricing="1=0,1, 10=0,009, 100=0,0071, 1000=0,00612, 2500=0,0051, 5000=0,00407 (USD)", Reach SVHC Compliant=Yes, Reference Standard=AEC-Q200, RoHS Compliant=Yes, Stock=72156, Supplier=Digikey, Technology="METAL GLAZE/THICK FILM", Terminal Finish=Nickel, Termination=Wraparound
R17: library part AC0402FR-0747KL, "RES SMD 47K OHM 1% 1/16W 0402", Case/Package=0402, LCSC Part Number=C144757, Manufacturer=Yageo, Max Operating Temperature=155°C, Min Operating Temperature=-55°C, Package Height=0.32mm, Package Length=1mm, Package Shape=Rectangular, Package Width=0.5mm, Power=62.5mW, Rated Temperature=70°C, Resistor Type="FIXED RESISTOR", Supplier Part Number=YAG3490CT-ND, Temperature Coefficient (ppm/Cel)=100, Tolerance=1%, Working Voltage=50V, Additional Feature="LASER TRIMMABLE", Category="Chip SMD Resistors", ComponentLink1Description=https://datasheet.ciiva.com:443/pdfs/VipMasterIC/IC/YAGO/YAGO-S-A0003597364/YAGO-S-A0003597364-1.pdf?src-supplier=IHS+Markit, ComponentLink1URL=https://datasheet.ciiva.com:443/pdfs/VipMasterIC/IC/YAGO/YAGO-S-A0003597364/YAGO-S-A0003597364-1.pdf?src-supplier=IHS+Markit, ComponentLink2Description=https://datasheet.ciiva.com/12576/pyu-ac-51-rohs-l-2-12576549.pdf?src-supplier=Mouser, ComponentLink2URL=https://datasheet.ciiva.com/12576/pyu-ac-51-rohs-l-2-12576549.pdf?src-supplier=Mouser, Construction=Chip, JESD-609 Code=e3, Manufacturer Part Number=AC0402FR-0747KL, Mounting Technology="Surface Mount", Packaging="Tape and Reel", Pins=2, Pricing="1=0,1, 10=0,011, 100=0,0082, 1000=0,00612, 2500=0,0051, 5000=0,00407 (USD)", Reach SVHC Compliant=Yes, Reference Standard=AEC-Q200, RoHS=Yes, RoHS Compliant=Yes, Stock=187655, Supplier=Digikey, Technology="METAL GLAZE/THICK FILM", Terminal Finish=Nickel, Termination=Wraparound
R18: library part RT0402BRE0750RL, "RES SMD 50 OHM 0.1% 1/16W 0402", Case/Package=0402, LCSC Part Number=C853312, Manufacturer=Yageo, Max Operating Temperature=155°C, Min Operating Temperature=-55°C, Package Shape=Rectangular, Power=62.5mW, Rated Temperature=70°C, Resistor Type="FIXED RESISTOR", Supplier Part Number=13-RT0402BRE0750RLCT-ND, Temperature Coefficient (ppm/Cel)=50, Tolerance=0.1%, Working Voltage=50V, Additional Feature="LASER TRIMMABLE", Category="Chip SMD Resistors", ComponentLink1Description=https://datasheet.ciiva.com:443/pdfs/VipMasterIC/IC/YAGO/YAGO-S-A0003507815/YAGO-S-A0003507815-1.pdf?src-supplier=IHS+Markit, ComponentLink1URL=https://datasheet.ciiva.com:443/pdfs/VipMasterIC/IC/YAGO/YAGO-S-A0003507815/YAGO-S-A0003507815-1.pdf?src-supplier=IHS+Markit, ComponentLink2Description=http://www.yageo.com/documents/recent/PYu-RT_1-to-0.01_RoHS_L_9.pdf?src-supplier=Digikey, ComponentLink2URL=http://www.yageo.com/documents/recent/PYu-RT_1-to-0.01_RoHS_L_9.pdf?src-supplier=Digikey, ComponentLink3Description=https://datasheet.octopart.com/RT0402BRE0750RL-Yageo-datasheet-166250672.pdf?src-supplier=Future+Electronics, ComponentLink3URL=https://datasheet.octopart.com/RT0402BRE0750RL-Yageo-datasheet-166250672.pdf?src-supplier=Future+Electronics, ComponentLink4Description=https://datasheet.octopart.com/RT0402BRE0750RL-Yageo-datasheet-176402239.pdf?src-supplier=Farnell, ComponentLink4URL=https://datasheet.octopart.com/RT0402BRE0750RL-Yageo-datasheet-176402239.pdf?src-supplier=Farnell, ComponentLink5Description=https://datasheet.octopart.com/RT0402BRE0750RL-Yageo-datasheet-176402239.pdf?src-supplier=Element14, ComponentLink5URL=https://datasheet.octopart.com/RT0402BRE0750RL-Yageo-datasheet-176402239.pdf?src-supplier=Element14, Manufacturer Part Number=RT0402BRE0750RL, Mounting Technology="Surface Mount", Packaging="Tape and Reel", Pins=2, Pricing="1=0,18, 10=0,133, 50=0,1072, 100=0,0959, 500=0,0765, 1000=0,06834, 5000=0,05406 (USD)", Reach SVHC Compliant=Yes, RoHS=Yes, RoHS Compliant=Yes, Stock=6180, Supplier=Digikey, Technology="THIN FILM", Termination=Wraparound
R20: library part TS53YL103MR10, "TRIMMER 10K OHM 0.25W GW TOP ADJ", Case/Package=2020, LCSC Part Number=C5189226, Manufacturer=Vishay, Max Operating Temperature=125°C, Min Operating Temperature=-55°C, Package Height=2.7mm, Package Length=5mm, Package Shape=Rectangular, Power=250mW, Rated Temperature=70°C, Resistance Law=Linear, Resistor Type=TRIMMER, Supplier Part Number=TS53YL-10KCT-ND, Temperature Coefficient (ppm/Cel)=-100,100, Tolerance=20%, Working Voltage=50V, Actuator Orientation=Vertical, Actuator Type=SCREW, Category="Variable Resistors and Potentiometers", ComponentLink1Description=https://datasheet.ciiva.com:443/pdfs/VipMasterIC/IC/VISH/VISH-S-A0007084328/VISH-S-A0007084328-1.pdf?src-supplier=IHS+Markit, ComponentLink1URL=https://datasheet.ciiva.com:443/pdfs/VipMasterIC/IC/VISH/VISH-S-A0007084328/VISH-S-A0007084328-1.pdf?src-supplier=IHS+Markit, ComponentLink2Description=https://datasheet.ciiva.com/11831/0900766b80442f56-11831494.pdf?src-supplier=Rs, ComponentLink2URL=https://datasheet.ciiva.com/11831/0900766b80442f56-11831494.pdf?src-supplier=Rs, ComponentLink3Description=https://datasheet.ciiva.com/2156/ts53y-2156140.pdf?src-supplier=Digikey, ComponentLink3URL=https://datasheet.ciiva.com/2156/ts53y-2156140.pdf?src-supplier=Digikey, ComponentLink4Description=https://datasheet.ciiva.com/2156/ts53y-2156141.pdf?src-supplier=Digikey, ComponentLink4URL=https://datasheet.ciiva.com/2156/ts53y-2156141.pdf?src-supplier=Digikey, ComponentLink5Description=https://datasheet.ciiva.com/2156/ts53y-2156142.pdf?src-supplier=Digikey, ComponentLink5URL=https://datasheet.ciiva.com/2156/ts53y-2156142.pdf?src-supplier=Digikey, ComponentLink6Description=https://datasheet.ciiva.com/16716/70218802-16716550.pdf?src-supplier=Allied+Electronics, ComponentLink6URL=https://datasheet.ciiva.com/16716/70218802-16716550.pdf?src-supplier=Allied+Electronics, ComponentLink7Description=https://datasheet.ciiva.com/8021/1696501-8021141.pdf?src-supplier=Element14, ComponentLink7URL=https://datasheet.ciiva.com/8021/1696501-8021141.pdf?src-supplier=Element14, Construction=Trimmer, JESD-609 Code=e3, Manufacturer Part Number=TS53YL103MR10, Mounting Technology="Surface Mount", Number of Turns=1, Package Width=5mm, Packaging="Tape and Reel", Pins=3, Pricing="1=2,72, 10=2,29, 100=1,9223 (USD)", Reach SVHC Compliant=Yes, RoHS=Yes, RoHS Compliant=Yes, Rotational Angle=220°, Stock=947, Supplier=Digikey, Technology=CERMET, Terminal Finish=Tin, Termination="Gull Wing"
R23: library part AC0402FR-132KL, "RES 2K OHM 1% 1/16W 0402", LCSC Part Number=C144789, Manufacturer=Yageo, Supplier Part Number=13-AC0402FR-132KLDKR-ND, Category="Chip SMD Resistors", Manufacturer Part Number=AC0402FR-132KL, Pricing="1=0,1, 10=0,023, 100=0,0107, 1000=0,00577, 2500=0,00469, 5000=0,00407, 10000=0,00358 (USD)", RoHS=Yes, Stock=81716, Supplier=Digikey
R24: library part RC0402JR-07220KL, "RES 220K OHM 5% 1/16W 0402", Case/Package=0402, LCSC Part Number=C137900, Manufacturer=Yageo, Max Operating Temperature=155°C, Min Operating Temperature=-55°C, Package Height=0.35mm, Package Length=1mm, Package Shape=Rectangular, Package Width=0.5mm, Power=62.5mW, Rated Temperature=70°C, Resistor Type="FIXED RESISTOR", Supplier Part Number=311-220KJRCT-ND, Temperature Coefficient (ppm/Cel)=100, Tolerance=5%, Working Voltage=50V, Additional Feature="LASER TRIMMABLE", Category="Chip SMD Resistors", ComponentLink1Description=https://datasheet.ciiva.com:443/pdfs/VipMasterIC/IC/YAGO/YAGO-S-A0008145938/YAGO-S-A0008145938-1.pdf?src-supplier=IHS+Markit, ComponentLink1URL=https://datasheet.ciiva.com:443/pdfs/VipMasterIC/IC/YAGO/YAGO-S-A0008145938/YAGO-S-A0008145938-1.pdf?src-supplier=IHS+Markit, ComponentLink2Description=https://datasheet.ciiva.com/7983/1018594-7983565.pdf?src-supplier=Element14, ComponentLink2URL=https://datasheet.ciiva.com/7983/1018594-7983565.pdf?src-supplier=Element14, ComponentLink3Description=https://datasheet.ciiva.com/12558/pyu-rc0402-51-rohs-l-6-r-8721-12558319.pdf?src-supplier=Mouser, ComponentLink3URL=https://datasheet.ciiva.com/12558/pyu-rc0402-51-rohs-l-6-r-8721-12558319.pdf?src-supplier=Mouser, ComponentLink4Description=https://datasheet.ciiva.com/7850/1018594-7850175.pdf?src-supplier=Element14, ComponentLink4URL=https://datasheet.ciiva.com/7850/1018594-7850175.pdf?src-supplier=Element14, ComponentLink5Description=https://datasheet.ciiva.com/7850/1018594-7850174.pdf?src-supplier=Element14, ComponentLink5URL=https://datasheet.ciiva.com/7850/1018594-7850174.pdf?src-supplier=Element14, ComponentLink6Description=https://datasheet.ciiva.com/17067/pyu-rc0402-51-rohs-l-6-r-17067375.pdf?src-supplier=Future+Electronics, ComponentLink6URL=https://datasheet.ciiva.com/17067/pyu-rc0402-51-rohs-l-6-r-17067375.pdf?src-supplier=Future+Electronics, Construction=Chip, JESD-609 Code=e3, Manufacturer Part Number=RC0402JR-07220KL, Mounting Technology="Surface Mount", Packaging="Tape and Reel", Pins=2, Pricing="1=0,1, 10=0,007, 50=0,0066, 100=0,0061, 500=0,0056, 1000=0,0051, 5000=0,00408 (USD)", Reach SVHC Compliant=Yes, RoHS=Yes, RoHS Compliant=Yes, Stock=461341, Supplier=Digikey, Technology="METAL GLAZE/THICK FILM", Terminal Finish=Nickel, Termination=Wraparound
R25: library part RC0402FR-0749K9L, "RES 49.9K OHM 1% 1/16W 0402", Case/Package=0402, LCSC Part Number=C137969, Manufacturer=Yageo, Max Operating Temperature=155°C, Min Operating Temperature=-55°C, Package Height=0.35mm, Package Length=1mm, Package Shape=Rectangular, Package Width=0.5mm, Power=62.5mW, Rated Temperature=70°C, Resistor Type="FIXED RESISTOR", Supplier Part Number=311-49.9KLRCT-ND, Temperature Coefficient (ppm/Cel)=100, Tolerance=1%, Working Voltage=50V, Additional Feature="LASER TRIMMABLE", Category="Chip SMD Resistors", ComponentLink1Description=https://datasheet.ciiva.com:443/pdfs/VipMasterIC/IC/YAGO/YAGO-S-A0008145938/YAGO-S-A0008145938-1.pdf?src-supplier=IHS+Markit, ComponentLink1URL=https://datasheet.ciiva.com:443/pdfs/VipMasterIC/IC/YAGO/YAGO-S-A0008145938/YAGO-S-A0008145938-1.pdf?src-supplier=IHS+Markit, ComponentLink2Description=https://datasheet.ciiva.com/17071/pyu-rc0402-51-rohs-l-6-r-17071066.pdf?src-supplier=Future+Electronics, ComponentLink2URL=https://datasheet.ciiva.com/17071/pyu-rc0402-51-rohs-l-6-r-17071066.pdf?src-supplier=Future+Electronics, Construction=Chip, JESD-609 Code=e3, Manufacturer Part Number=RC0402FR-0749K9L, Mounting Technology="Surface Mount", Packaging="Tape and Reel", Pins=2, Pricing="1=0,1, 10=0,009, 100=0,0061, 1000=0,00408, 2500=0,00328 (USD)", Reach SVHC Compliant=Yes, RoHS=Yes, RoHS Compliant=Yes, Stock=2577197, Supplier=Digikey, Technology="METAL GLAZE/THICK FILM", Terminal Finish=Nickel, Termination=Wraparound